# EAGLE board pcb fix (EAGLE 9.5.1)
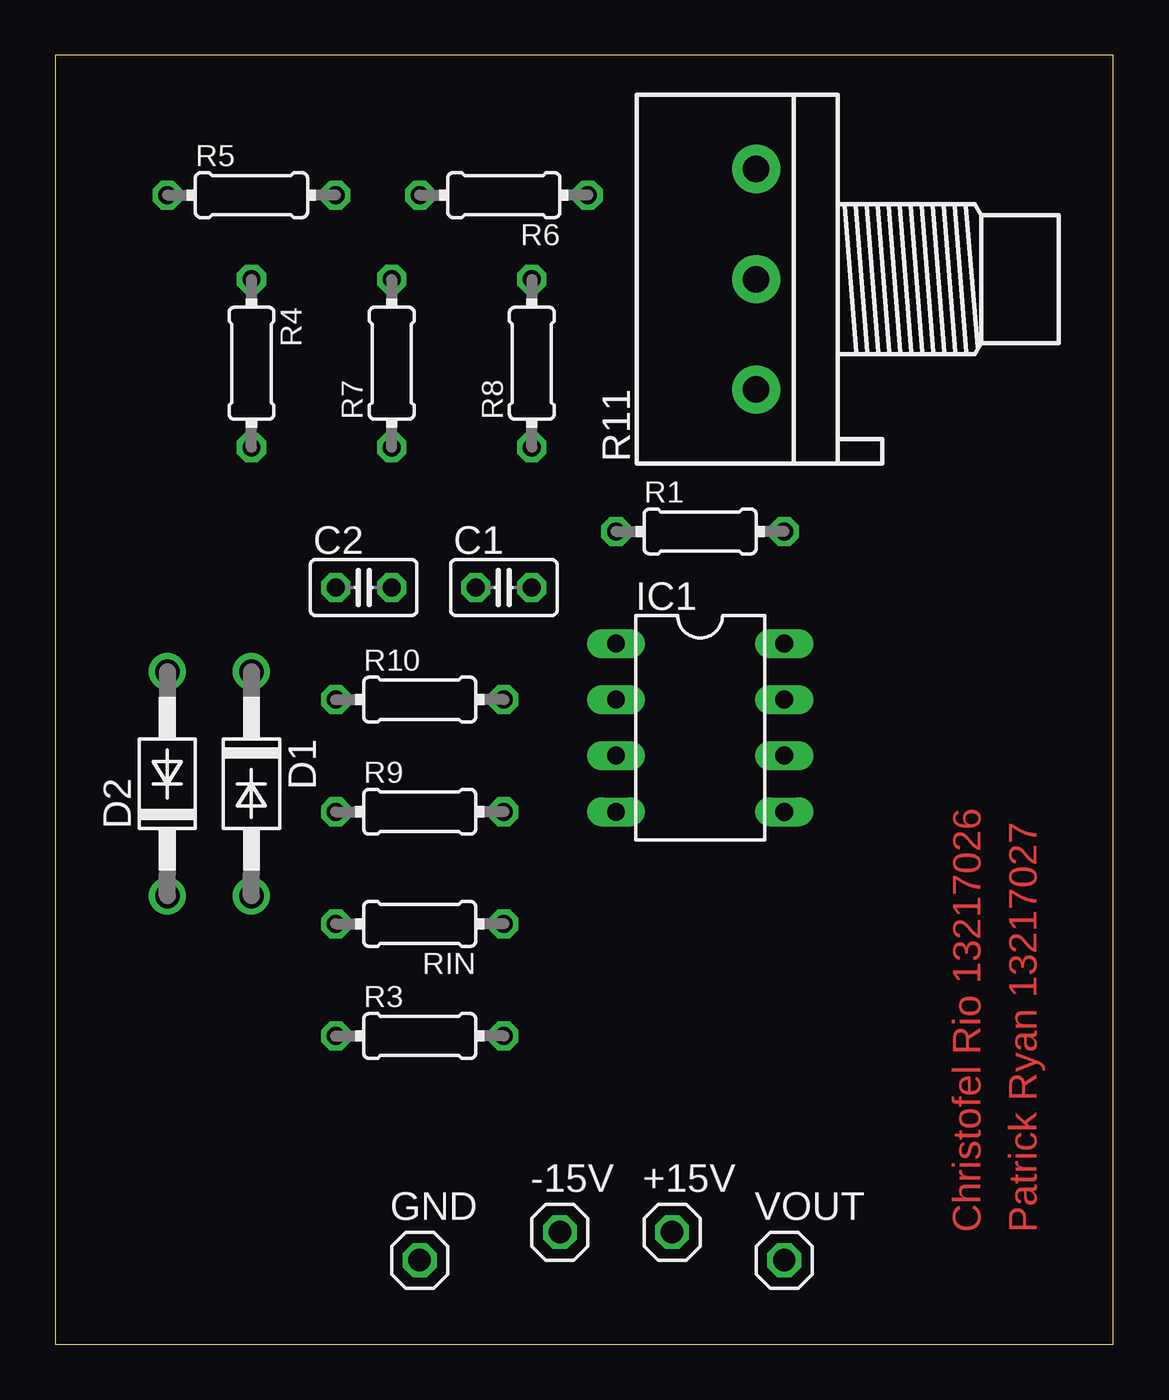
[diagram p0: board, top side]
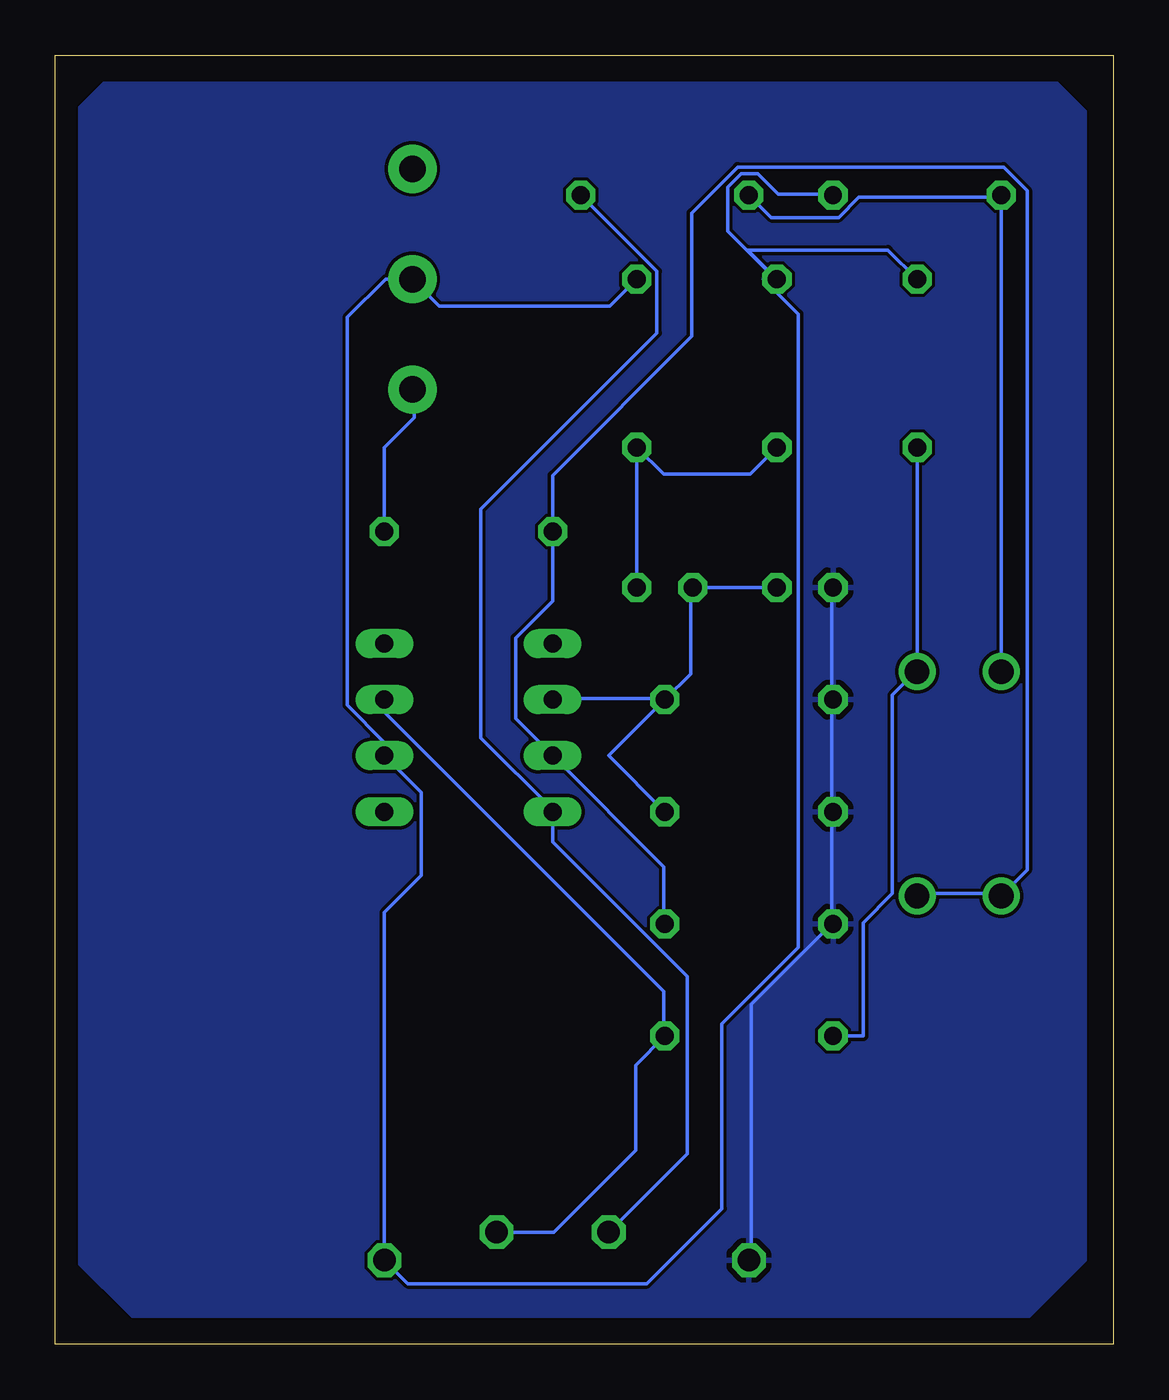
[diagram p1: board, bottom side, seen from below]

Size 47.93 x 58.41 mm. Coordinates in mm from the lower left corner, seen from the top.
Outline: 0,0 47.93,0 47.93,58.41 0,58.41 0,0
Copper layers (1*16): Top 0.035mm / dielectric 1.5mm / Bottom 0.035mm
Design rules "default *": minimum track width 6mil, minimum drill 0.35mm, track to track 6mil, track to pad 6mil, pad to pad 6mil, via to via 6mil, smd to smd 6mil, copper to edge 40mil, drill to drill 6mil, minimum pad ring 10mil, minimum via ring 8mil, stop-mask expansion 4mil, vias tented up to drill 0mil, thermal gap 10mil

## Footprints (pad centres in the part's own frame; a part is rotated, then mirrored left to right if it is on the bottom)
1X01 = drill 1.016 octagon: 1 0,0
C025-025X050 = drill 0.813 octagon: 1 -1.27,0; 2 1.27,0
DO41-10 = drill 1.118: A 5.08,0; C -5.08,0
DIL08 = drill 0.813 long: 1 -3.81,-3.81; 2 -1.27,-3.81; 3 1.27,-3.81; 4 3.81,-3.81; 5 3.81,3.81; 6 1.27,3.81; 7 -1.27,3.81; 8 -3.81,3.81
0204/7 = drill 0.813 octagon: 1 -3.81,0; 2 3.81,0
3RP/1610N = drill 1.2 pad 2.184: 1 -5,0; 2 0,0; 3 5,0

## Placement (x,y rotation side)
+15V  +15V  [1X01]  27.94,5.08 0 top
-15V  -15V  [1X01]  22.86,5.08 0 top
C1  22n  [C025-025X050]  20.32,34.29 0 top
C2  22n  [C025-025X050]  13.97,34.29 0 top
D1  1N4001  [DO41-10]  8.89,25.4 270 top
D2  1N4001  [DO41-10]  5.08,25.4 90 top
GND  GND  [1X01]  16.51,3.81 0 top
IC1  LM741P  [DIL08]  29.21,27.94 270 top
R1  20k  [0204/7]  29.21,36.83 0 top
R3  2.2k  [0204/7]  16.51,13.97 0 top
R4  1k  [0204/7]  8.89,44.45 270 top
R5  1k  [0204/7]  8.89,52.07 0 top
R6  2.2k  [0204/7]  20.32,52.07 180 top
R7  1.8k  [0204/7]  15.24,44.45 90 top
R8  1.8k  [0204/7]  21.59,44.45 90 top
R9  1.8k  [0204/7]  16.51,24.13 0 top
R10  1.8k  [0204/7]  16.51,29.21 0 top
R11  [3RP/1610N]  31.75,48.26 90 top
RIN  10k  [0204/7]  16.51,19.05 180 top
VOUT  [1X01]  33.02,3.81 0 top

## Library data of the parts
+15V -15V GND VOUT = pinhead
C1 C2 = rcl; SPICEPREFIX: C
D1 D2 = tango
IC1 = linear4
R1 R3-R10 RIN = rcl; SPICEPREFIX: R
R11 = pot

## Nets
+15V: +15V.1 IC1.7 R3.2
-15V: -15V.1 IC1.4 R6.1
GND: C2.1 GND.1 R9.1 R10.1 RIN.2
N$1: D1.A D2.C IC1.3 R1.1 RIN.1
N$2: C1.1 C2.2 IC1.2 R9.2 R10.2
N$3: D1.C R3.1 R4.2
N$5: C1.2 R7.1 R8.1
N$6: D2.A R5.1 R6.2
N$7: R1.2 R11.1
VOUT: IC1.6 R4.1 R5.2 R7.2 R8.2 R11.2 VOUT.1

## Tracks (layer width: path | path; a pad name or v marks a point on that pad's centre or on a via)
+15V
  Bottom 0.152: +15V.1 25.35,5.08 21.64,8.79 21.64,12.65 R3.2 20.37,14.02 20.37,16 33.02,28.65 IC1.7
-15V
  Bottom 0.152: -15V.1 19.3,8.64 19.3,16.66 25.4,22.76 IC1.4 25.4,24.23 28.65,27.48 28.65,37.85 20.68,45.82 20.68,48.62 R6.1
GND
  Bottom 0.152: 12.75,24.08 12.75,19.05 | 12.75,29.26 12.75,24.18 R9.1 | 12.75,29.26 12.75,34.29 C2.1 | 12.75,29.26 R10.1 | 12.75,19.05 16.41,15.39 16.41,3.81 GND.1 | 12.75,19.05 RIN.2
  pour Bottom: 2.54,57.15 45.72,57.15 46.99,55.88 46.99,3.81 44.45,1.27 3.81,1.27 1.27,3.81 1.27,55.88
N$1
  Bottom 0.152: D1.A 8.79,20.42 5.18,20.42 D2.C 3.91,21.49 3.91,52.27 4.98,53.34 17.02,53.34 19.1,51.26 19.1,45.67 25.4,39.37 R1.1 25.4,33.68 27.08,32 27.08,28.35 IC1.3 20.37,21.64 20.37,19.05 RIN.1
N$2
  Bottom 0.152: C2.2 C1.1 19.15,34.29 19.15,30.38 R10.2 | R9.2 22.86,26.67 R10.2 | IC1.2 25.4,29.26 20.37,29.26 R10.2
N$3
  Bottom 0.152: R4.2 D1.C 8.94,30.48 10.01,29.41 10.01,20.42 11.33,19.1 11.33,13.97 R3.1
N$5
  Bottom 0.152: R7.1 16.46,39.42 20.37,39.42 R8.1 C1.2
N$6
  Bottom 0.152: R6.2 15.49,51.05 12.45,51.05 11.53,51.97 5.18,51.97 R5.1 D2.A
N$7
  Bottom 0.152: R1.2 33.02,40.64 31.67,41.99 31.67,43.18 R11.1
VOUT
  Bottom 0.152: R4.1 10.21,49.58 16.56,49.58 R7.2 | R5.2 12.75,52.12 15.19,52.12 16.1,53.04 16.87,53.04 17.47,52.43 17.47,50.44 15.29,48.26 R7.2 | R8.2 22.81,47.04 30.53,47.04 R11.2 32.97,48.26 34.7,46.53 34.7,28.96 33.02,27.28 IC1.6 31.34,24.99 31.34,21.23 33.02,19.56 VOUT.1 31.95,2.74 21.13,2.74 17.73,6.15 17.73,14.53 14.27,17.98 14.27,46.69 15.85,48.26 R7.2

## Text on the board
Top: Christofel Rio 13217026 | Patrick Ryan 13217027